# EAGLE board rgbsaber_periph1_v1.6 (EAGLE 5.10)
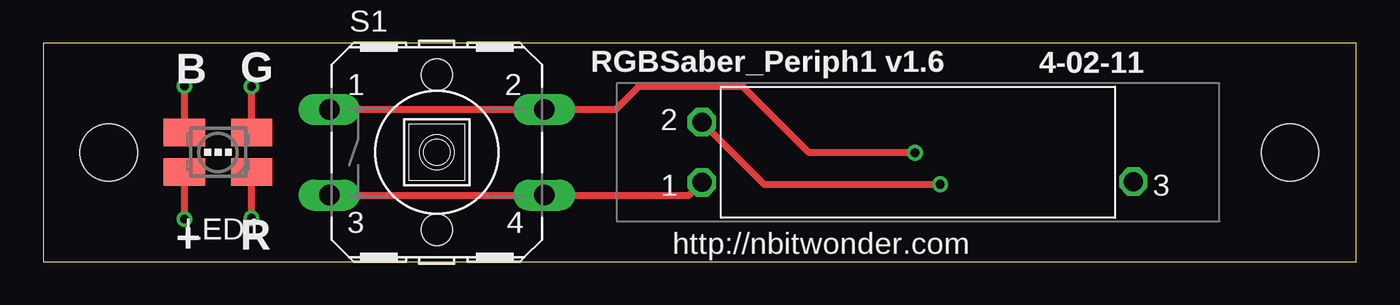
[diagram p0: board, top side]
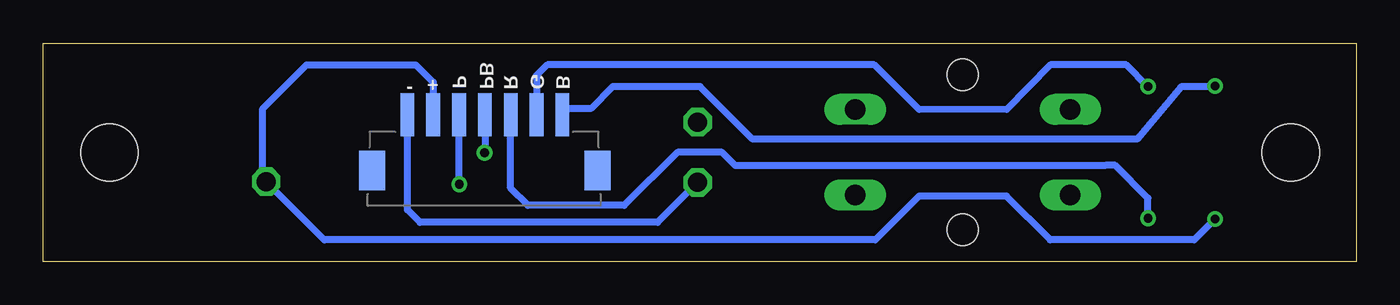
[diagram p1: board, bottom side, seen from below]

Size 76.25 x 12.69 mm. Coordinates in mm from the lower left corner, seen from the top.
Outline: 0,0 76.25,0 76.25,12.69 0,12.69 0,0
Copper layers (1*16): Top 0.035mm / dielectric 1.5mm / Bottom 0.035mm
Design rules "default *": minimum track width 10mil, minimum drill 24mil, track to track 8mil, track to pad 8mil, pad to pad 8mil, via to via 8mil, smd to smd 8mil, copper to edge 40mil, drill to drill 8mil, minimum pad ring 10mil, minimum via ring 8mil, stop-mask expansion 4mil, vias tented up to drill 20mil, thermal gap 10mil

## Footprints (pad centres in the part's own frame; a part is rotated, then mirrored left to right if it is on the bottom)
SLIDER-CUSTOM = drill 1.1 octagon: P$1 -12.5,1.7; P$2 12.55,1.75; P$3 12.55,-1.75
JST_ZH_SM4_TE_7 = smd 0.8 x 2.5: 1 -4.5,-3; 2 -3,-3; 3 -1.5,-3; 4 0,-3; 5 1.5,-3; 6 3,-3; 7 4.5,-3 | smd 1.5 x 2.3: NC0 -6.55,0.25; NC1 6.55,0.25
PLCC4 = smd 1.6 x 2.4: A -1.15,1.95; C@1 -1.15,-1.95; C@3 1.15,1.95; C@4 1.15,-1.95
B3F-40XX = drill 1.194 long: 1 -6.248,2.489; 2 6.248,2.489; 3 -6.248,-2.489; 4 6.248,-2.489 | hole 1.803: 0,-4.496; 0,4.496
STAND-OFF = hole 3.302: 0,0

## Placement (x,y rotation side)
ADJUST  SLIDERV1  [SLIDER-CUSTOM]  50.8,6.35 180 top
JST_SMD1  1X07_JST  [JST_ZH_SM4_TE_7]  50.6,5.54 180 bottom
LED1  [PLCC4]  10.16,6.35 90 top
S1  [B3F-40XX]  22.86,6.35 0 top
U$5  [STAND-OFF]  3.81,6.35 0 top
U$6  [STAND-OFF]  72.39,6.35 90 top

## Library data of the parts
ADJUST = purduecer
JST_SMD1 LED1 = NBitWonder
S1 = switch-omron
U$5 U$6 = SparkFun

## Nets
BLUE: JST_SMD1.1 LED1.C@3
GREEN: JST_SMD1.2 LED1.C@4
PB_0: JST_SMD1.4 S1.1 S1.2
PWR: ADJUST.P$1 JST_SMD1.6 LED1.A
RED: JST_SMD1.3 LED1.C@1
SLIDE: ADJUST.P$3 JST_SMD1.5
VSS: ADJUST.P$2 JST_SMD1.7 S1.3 S1.4

## Tracks (layer width: path | path; a pad name or v marks a point on that pad's centre or on a via)
BLUE  (via drill 0.5)
  Top 0.406: v8.21,10.2 LED1.C@3
  Bottom 0.406: JST_SMD1.1 45.74,8.89 44.45,8.89 43.18,10.16 38.1,10.16 35.06,7.12 12.73,7.12 10.16,10.16 8.25,10.16 v8.21,10.2
GREEN  (via drill 0.5)
  Top 0.406: v12.1,10.16 LED1.C@4
  Bottom 0.406: JST_SMD1.2 47.6,10.8 47.61,10.81 46.99,11.43 27.99,11.43 25.4,8.84 20.31,8.84 17.78,11.43 13.37,11.43 v12.1,10.16
PB_0  (via drill 0.5)
  Top 0.406: S1.1 S1.2 33.23,8.84 34.56,10.16 40.64,10.16 44.47,6.33 v50.62,6.33
  Bottom 0.406: JST_SMD1.4 50.6,6.34 v50.62,6.33
PWR  (via drill 0.5)
  Top 0.406: v8.21,2.48 LED1.A
  Bottom 0.406: 53.6,7.88 JST_SMD1.6 53.6,10.42 54.61,11.43 60.96,11.43 63.5,8.89 63.5,4.85 ADJUST.P$1 59.92,1.27 27.94,1.27 25.4,3.81 20.32,3.81 17.78,1.27 9.43,1.27 v8.21,2.48
RED  (via drill 0.5)
  Top 0.406: v12.11,2.52 LED1.C@1
  Bottom 0.406: JST_SMD1.3 49.1,4.26 48.1,3.27 42.52,3.27 39.43,6.35 36.83,6.35 36.06,5.58 14.59,5.58 14.58,5.58 14.01,5.58 12.11,3.69 v12.11,2.52
SLIDE  (via drill 0.5)
  Top 0.406: v52.08,4.5 41.85,4.5 ADJUST.P$3
  Bottom 0.406: JST_SMD1.5 52.1,4.53 v52.08,4.5
VSS
  Top 0.406: S1.3 S1.4 37.51,3.86 ADJUST.P$2
  Bottom 0.406: JST_SMD1.7 55.1,3.02 54.37,2.29 40.56,2.29 ADJUST.P$2

## Text on the board
tPlace: RGBSaber_Periph1 v1.6 | 4-02-11 | B | G | + | R | http://nbitwonder.com
bPlace: B | G | R | PB | P | + | -